# Altium PCB PCB1.PcbDoc
Units mm, origin at the board's own origin, x right, y up, seen from the top; angles counter-clockwise.
Board outline 50.42 x 30.35 mm, 2 copper layers (Top Layer, Bottom Layer); 42 components, 33 nets, 148 pads, 28 vias.
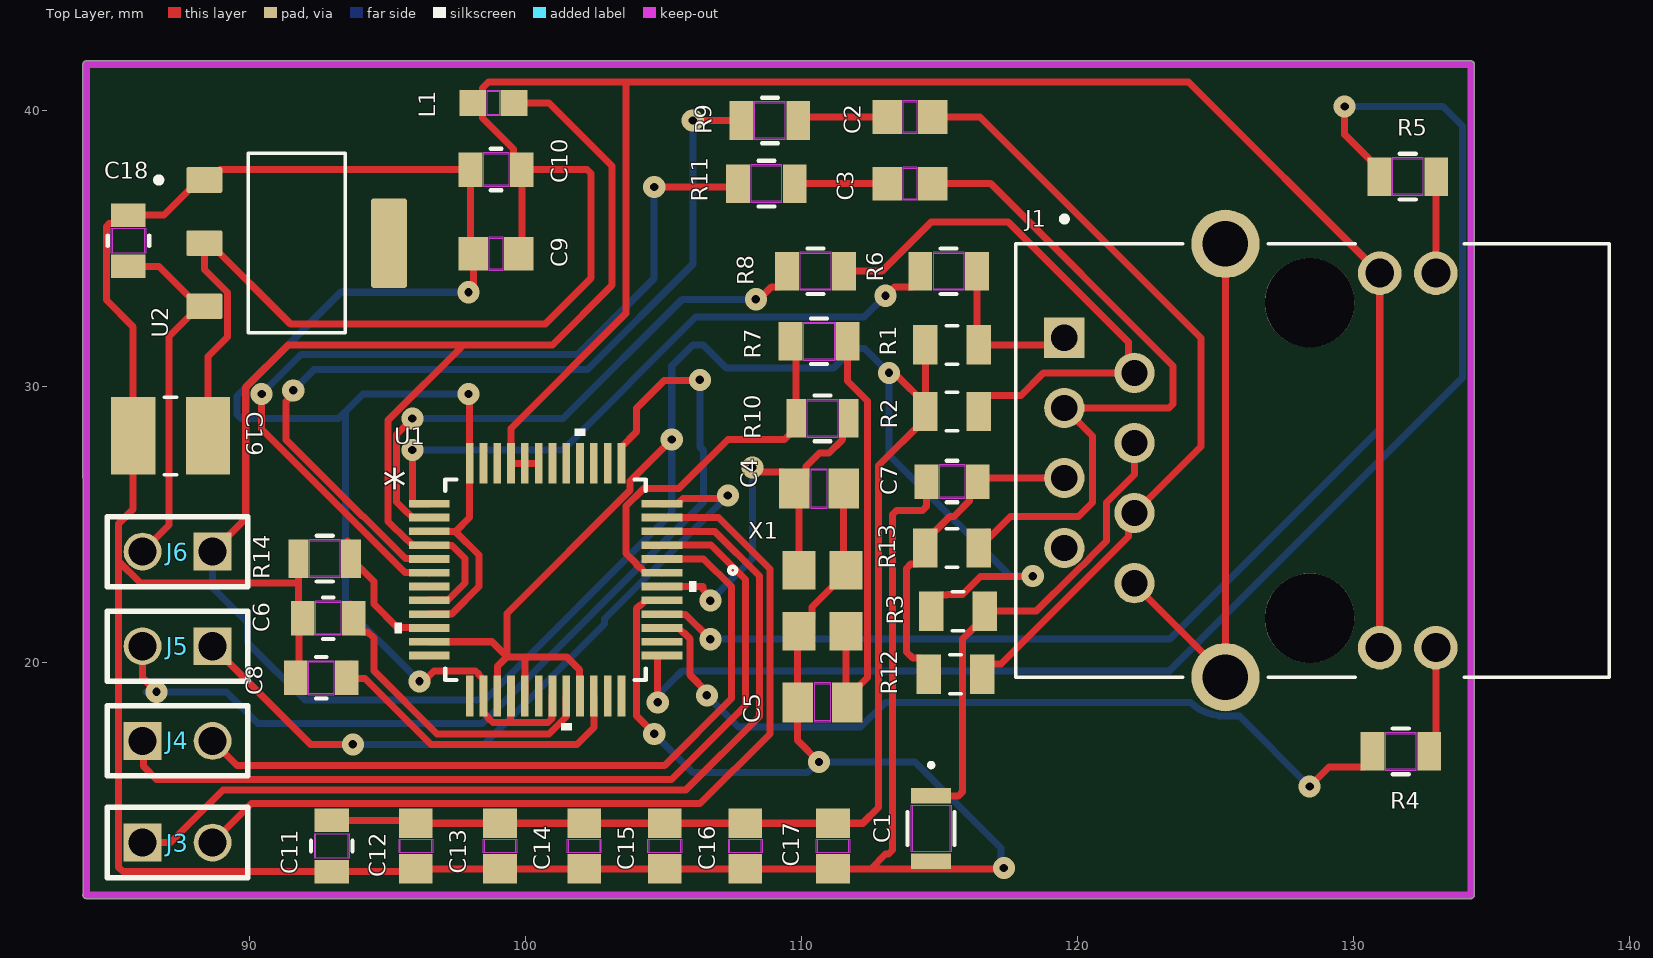
[diagram p0: Top Layer view]
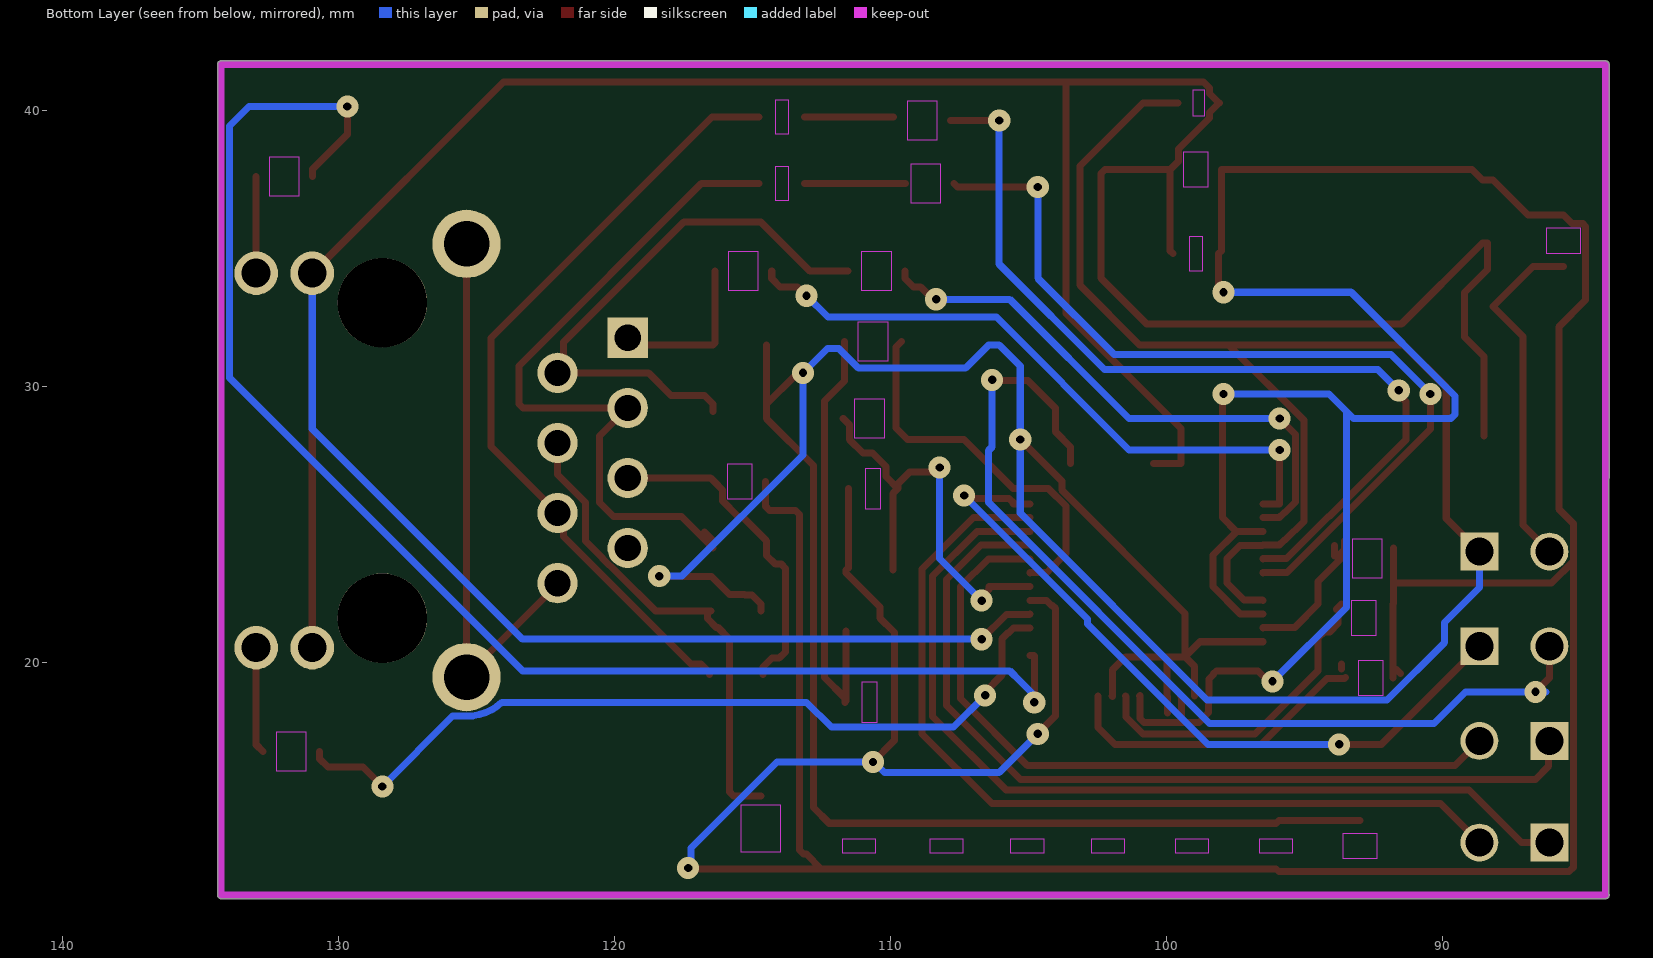
[diagram p1: Bottom Layer view, seen from below]
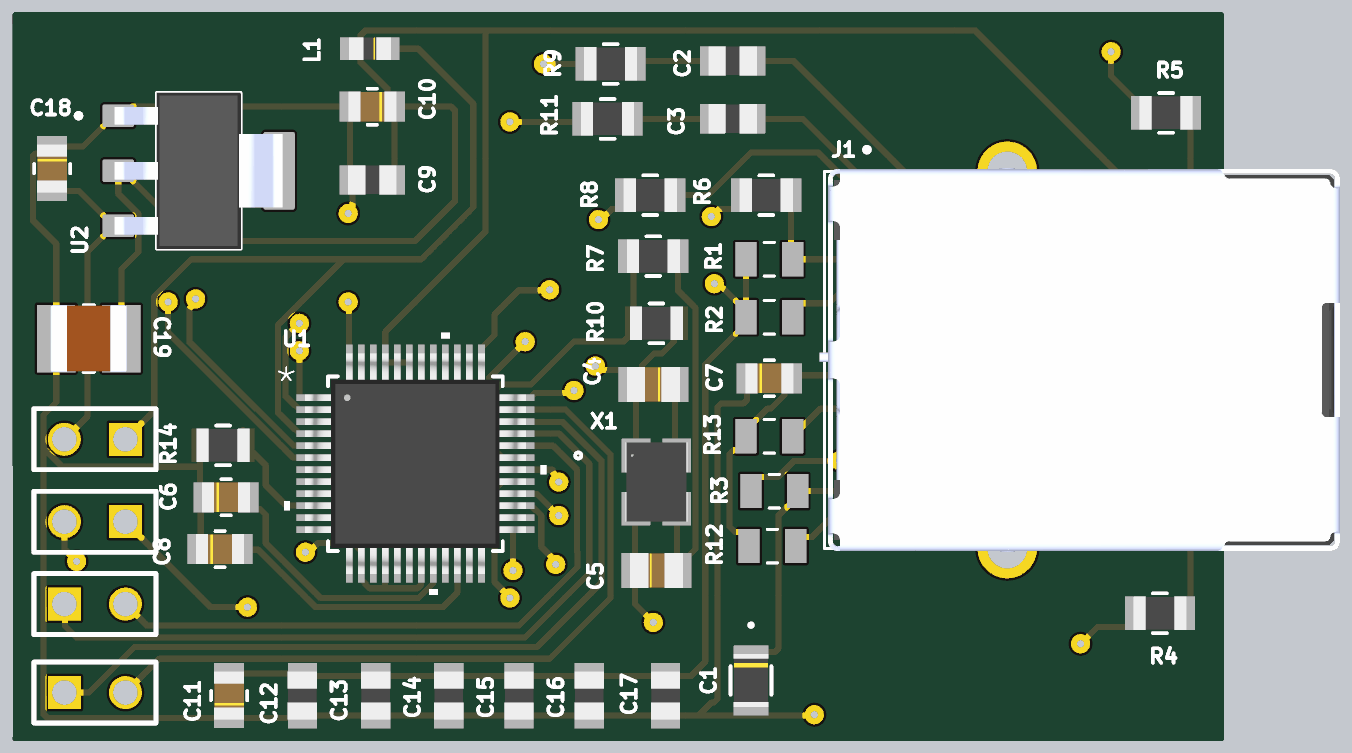
[diagram p2: 3D render of the assembled board from above, using the file's embedded part models]

## Layer stack, top to bottom
Top Solder: solder mask 0.0102, Solder Resist, Dk 3.5
Top Layer: signal copper 0.0356
Dielectric 1: dielectric 0.32, FR-4, Dk 4.8
Bottom Layer: signal copper 0.0356
Bottom Solder: solder mask 0.0102, Solder Resist, Dk 3.5

## Board outline
83.964,11.62 ccw(c84.074,11.557) 84.074,11.43 134.239,11.43 ccw(c134.239,11.557) 134.366,11.557 134.366,41.656 ccw(c134.239,41.656) 134.239,41.783 84.074,41.783 ccw(c84.074,41.656) 83.947,41.656

## Design rules (kind name [scope] priority, off if disabled: settings)
Clearance [All] p1: gap=0.05 ignorepadtopadclearanceinfootprint=FALSE
HoleSize [All] p1: absolutevalues=TRUE maxlimit=4 minlimit=0.025 maxpercent=80.000 minpercent=20.000
PolygonConnect [All] p1: connectstyle=Relief reliefconductorwidth=0.254 reliefentries=4 polygonreliefangle="90 Angle" airgapwidth=0.254
RoutingVias [All] p1: holewidth=0.711 width=1.27 viastyle="Through Hole" minholewidth=0.711 minwidth=1.27 maxholewidth=0.711 maxwidth=1.27
SolderMaskExpansion [All] p1: expansion=0.102 istentingtop=FALSE
Width [All] p1: maxlimit=0.254 minlimit=0.254 preferedwidth=0.254
29 further rules are at their usual default settings.

## Components (designator, comment, footprint, x,y, rotation, side; value= is the part's Value field where it differs from the comment)
C1 "22nF" CAP_2012_TDK 114.681,13.97 r270 top
C2 "CAP_6.8nfar_805pkg" CC0805N_YAG 113.919,39.751 r180 top
C3 "CAP_6.8nfar_805pkg" CC0805N_YAG 113.919,37.338 r180 top
C4 "18pF" CAP_CC0805_YAG 110.617,26.289 r180 top
C5 "18pF" CAP_CC0805_YAG 110.744,18.542 r0 top
C6 "4.7uF" CAP_CL21_SAM 92.837,21.59 r0 top
C7 "CAP_10nfar_805pkg" CAP_CL21_SAM 115.443,26.543 r0 top
C8 "10nF" CAP_CL21_SAM 92.583,19.431 r0 top
C9 "0.1uF" CC0805N_YAG 98.92,34.798 r180 top
C10 "10uF" CAP_CL21_SAM 98.92,37.846 r180 top
C11 "10uF" CAP_CL21_SAM 92.964,13.335 r90 top
C12 "0.1uF" CC0805N_YAG 96.012,13.335 r90 top
C13 "0.1uF" CC0805N_YAG 99.06,13.335 r90 top
C14 "0.1uF" CC0805N_YAG 102.108,13.335 r90 top
C15 "0.1uF" CC0805N_YAG 105.029,13.335 r90 top
C16 "0.1uF" CC0805N_YAG 107.95,13.335 r90 top
C17 "0.1uF" CC0805N_YAG 111.125,13.335 r90 top
C18 "10uF" CAP_CL21_SAM 85.598,35.267 r270 top
C19 "22uF" CAPC3225X280N 87.122,28.194 r0 top
J1 "ARJM11D7-009-AB-EW2" ABRACON_ARJM11D7-009-AB-EW2 128.397,27.305 r90 top
J3 "TSW-101-07-F-D" SAMTEC_TSW-101-07-F-D 87.376,13.462 r270 top
J4 "TSW-101-07-F-D" SAMTEC_TSW-101-07-F-D 87.376,17.145 r270 top
J5 "TSW-101-07-F-D" SAMTEC_TSW-101-07-F-D 87.376,20.574 r90 top
J6 "TSW-101-07-F-D" SAMTEC_TSW-101-07-F-D 87.376,24.003 r90 top
L1 "BLM18SG121TN1D" IND_BLM18_0603_MUR 98.819,40.259 r180 top
R1 "RES_49.9ohm_805pkg" RESC2012X60N 115.443,31.496 r180 top
R2 "RES_49.9ohm_805pkg" RESC2012X60N 115.443,29.083 r180 top
R3 "RES_49.9ohm_805pkg" RESC2012X60N 115.651,21.844 r180 top
R4 "330" RES_CRCW_0805_VIS 131.699,16.764 r0 top
R5 "330" RES_CRCW_0805_VIS 131.953,37.592 r0 top
R6 "RES_0ohm_805pkg" RES_CRCW_0805_VIS 115.316,34.163 r0 top
R7 "0" RES_CRCW_0805_VIS 110.617,31.623 r0 top
R8 "RES_0ohm_805pkg" RES_CRCW_0805_VIS 110.49,34.163 r0 top
R9 "RES_0ohm_805pkg" RES_CRCW_0805_VIS 108.839,39.624 r0 top
R10 "1M" RES_CRCW_0805 110.744,28.829 r0 top
R11 "RES_0ohm_805pkg" RES_CRCW_0805_VIS 108.712,37.338 r0 top
R12 "RES_49.9ohm_805pkg" RESC2012X60N 115.57,19.558 r0 top
R13 "RES_49.9ohm_805pkg" RESC2012X60N 115.443,24.13 r0 top
R14 "12.4K" RES_CRCW_0805 92.71,23.749 r180 top
U1 "W5500" 48LQFP_W5500_WIZ 100.711,22.987 r0 top
U2 "AMS1117-3.3" SOT229P700X180-4N 91.694,35.179 r0 top
X1 "OSC/25M" ABM8G_ABR 110.744,22.225 r0 top

## Footprints (in the part's own frame and the unit in brackets; to place one, negate y for a bottom-side part, rotate by r counter-clockwise, add the part's x,y. Pads: shape width x height; smd on the part's side, far side on the other; paste and mask are expansions set on the pad)
48LQFP_W5500_WIZ [mil]
  rect 58x11 smd paste+0 mask+0: 1(-166,108.27) 2(-166,88.58) 3(-166,68.9) 4(-166,49.21) 5(-166,29.53) 6(-166,9.84) 7(-166,-9.84) 8(-166,-29.53) 9(-166,-49.21) 10(-166,-68.9) 11(-166,-88.58) 12(-166,-108.27) 25(166,-108.27) 26(166,-88.58) 27(166,-68.9) 28(166,-49.21) 29(166,-29.53) 30(166,-9.84) 31(166,9.84) 32(166,29.53) 33(166,49.21) 34(166,68.9) 35(166,88.58) 36(166,108.27)
  rect 11x58 smd paste+0 mask+0: 13(-108.27,-166) 14(-88.58,-166) 15(-68.9,-166) 16(-49.21,-166) 17(-29.53,-166) 18(-9.84,-166) 19(9.84,-166) 20(29.53,-166) 21(49.21,-166) 22(68.9,-166) 23(88.58,-166) 24(108.27,-166) 37(108.27,166) 38(88.58,166) 39(68.9,166) 40(49.21,166) 41(29.53,166) 42(9.84,166) 43(-9.84,166) 44(-29.53,166) 45(-49.21,166) 46(-68.9,166) 47(-88.58,166) 48(-108.27,166)
  silkscreen extent -215,-215 215,215, body extent -181,-181 181,181, height 63
ABM8G_ABR [mil]
  rect 47x55 smd paste+0 mask+0: 1(-33.5,43.5) 2(-33.5,-43.5) 3(33.5,-43.5) 4(33.5,43.5)
  silkscreen extent -133,39 -123,48, body extent -51,-65 51,65, height 39
ABRACON_ARJM11D7-009-AB-EW2 [mm]
  rect 1.458x1.458 / inner round 1.458 / far side rect 1.458x1.458 hole 0.95: 1(4.445,8.89)
  round 1.458 hole 0.95: 2(3.175,6.35) 3(1.905,8.89) 4(0.635,6.35) 5(-0.635,8.89) 6(-1.905,6.35) 7(-3.175,8.89) 8(-4.445,6.35)
  round 1.575 hole 1.05: 9(-6.785,-2.54) 10(-6.785,-4.57) 11(6.785,-2.54) 12(6.785,-4.57)
  round 2.475 hole 1.65: SH1(-7.85,3.05) SH2(7.85,3.05)
  round 3.25 hole 3.25 unplated: ""(-5.715,0) ""(5.715,0)
  silkscreen extent -7.85,-10.85 8.85,10.65, body extent -7.99,-10.8 7.99,10.85, height 13.26
CAP_2012_TDK [mil]
  rect 22x57 smd paste+0 mask+0: 1(-46.5,0) 2(46.5,0)
  Top Layer keep-out region: -33.5,-26.5 -33.5,26.5 33.5,26.5 33.5,-26.5
  Keep-Out Layer region: -33.5,-28.5 -33.5,28.5 33.5,28.5 33.5,-28.5
  silkscreen extent -93,-34 23,34, body extent -44,-29 44,29, height 49
CAP_CC0805_YAG [mil]
  rect 44x57 smd paste+0 mask+0: 1(-35.31,0) 2(35.31,0)
  Top Layer keep-out region: -11.31,-26.5 -11.31,26.5 11.31,26.5 11.31,-26.5
  Keep-Out Layer region: -11.31,-28.5 -11.31,28.5 11.31,28.5 11.31,-28.5
  body extent -43,-29 43,29, height 57
CAP_CL21_SAM [mm]
  rect 0.856x1.25 smd paste+0 mask+0: 1(-0.928,0) 2(0.928,0)
  Top Layer keep-out region: -0.449,-0.574 -0.449,0.574 0.449,0.574 0.449,-0.574
  Keep-Out Layer region: -0.449,-0.625 -0.449,0.625 0.449,0.625 0.449,-0.625
  silkscreen extent -0.19,-0.75 0.19,0.75, body extent -1,-0.63 1,0.63, height 1.35
CAPC3225X280N [mm]
  rect 1.6x2.81 smd: 1(-1.353,0) 2(1.353,0)
  silkscreen extent -0.23,-1.4 0.23,1.4, body extent -1.6,-1.4 1.6,1.4, height 2.47
CC0805N_YAG [mil]
  rect 42x48 smd paste+0 mask+0: 1(-32.5,0) 2(32.5,0)
  Top Layer keep-out region: -9.5,-22 -9.5,22 9.5,22 9.5,-22
  Keep-Out Layer region: -9.5,-24 -9.5,24 9.5,24 9.5,-24
  body extent -39,-24 39,24, height 28
IND_BLM18_0603_MUR [mil]
  rect 38x37 smd paste+0 mask+0: 1(-29.5,0) 2(29.5,0)
  Top Layer keep-out region: -8.5,-16.5 -8.5,16.5 8.5,16.5 8.5,-16.5
  Keep-Out Layer region: -8.5,-18.5 -8.5,18.5 8.5,18.5 8.5,-18.5
  body extent -34,-19 34,19, height 37
RES_CRCW_0805 [mil]
  rect 28x55 smd paste-27.5 mask-27.5: 1(-37.5,0) 2(37.5,0)
  Top Layer keep-out region: -21.5,-25.5 -21.5,25.5 21.5,25.5 21.5,-25.5
  Keep-Out Layer region: -21.5,-27.5 -21.5,27.5 21.5,27.5 21.5,-27.5
  silkscreen extent -11,-32 11,32, body extent -44,-27 44,27, height 20
RES_CRCW_0805_VIS [mil]
  rect 34x55 smd paste+0 mask+0: 1(-40.5,0) 2(40.5,0)
  Top Layer keep-out region: -21.5,-25.5 -21.5,25.5 21.5,25.5 21.5,-25.5
  Keep-Out Layer region: -21.5,-27.5 -21.5,27.5 21.5,27.5 21.5,-27.5
  silkscreen extent -11,-32 11,32, body extent -44,-27 44,27, height 20
RESC2012X60N [mm]
  rect 0.89x1.42 smd: 1(-0.97,0) 2(0.97,0)
  silkscreen extent -0.21,-0.7 0.21,0.7
SAMTEC_TSW-101-07-F-D [mm]
  rect 1.37x1.37 hole 1.02: 01(0,-1.27)
  round 1.37 hole 1.02: 02(0,1.27)
  silkscreen extent -1.27,-2.54 1.27,2.54
SOT229P700X180-4N [mm]
  rrect15% 1.31x0.93 smd: 1(-3.345,2.29) 2(-3.345,0) 3(-3.345,-2.29)
  rrect15% 1.31x3.24 smd: 4(3.345,0)
  silkscreen extent -5.1,-3.25 1.75,3.25, body extent -3.5,-3.25 3.5,3.25, height 1.8

## Part data
C1: library part CAP_22nfar_805pkg, "No Description Available", Mfr_Name=TDK
C2 C3: "No Description Available", Mfr_Name=Yageo
C4 C5: library part CAP_18pfar_805pkg, "No Description Available", Mfr_Name=Yageo
C6: library part CAP_4.7ufar_805pkg, "No Description Available", Mfr_Name=Samsung
C7: "No Description Available", Mfr_Name=Samsung
C8: library part CAP_10nfar_805pkg, "No Description Available", Mfr_Name=Samsung
C9 C12 C13 C14 C15 C16 C17: library part CAP_0.1ufar_805pkg, "No Description Available", Mfr_Name=Yageo
C10 C11 C18: library part CAP_10ufar_805pkg, "No Description Available", Mfr_Name=Samsung
C19: library part GCJ32ER71C226KE01L, "SMD Capacitor X7R_EIA_ with Capacitance: 22uF Tol. 10%. Rated Voltage: 16Vdc", Package="3225 Murata", Availability=Unavailable, MF=Murata, MP=GCJ32ER71C226KE01L, Price=None, SnapEDA_Link=https://www.snapeda.com/parts/GCJ32ER71C226KE01L/Murata/view-part/4383175/?ref=snap
J1 J3 J4 J5 J6: Package=None, Availability=Unavailable, Price=None
  J1: MF="{'manufacturer': u'Abracon LLC'}", MP=ARJM11D7-009-AB-EW2
  J3 J4 J5 J6: MF=Samtec, MP=TSW-101-07-F-D
L1: "No Description Available", Mfr_Name=Murata
R1 R2 R3 R12 R13: "49.9 Ohms Â±1% 0.125W, 1/8W Chip Resistor 0805 _2012 Metric_ Thick Film", Package="2012 Vishay", Digi-Key_Part_Number=541-4144-1-ND, Digi-Key_Purchase_URL=https://www.digikey.tn/product-detail/en/vishay-dale/CRCW080549R9FKEAC/541-4144-1-ND/7928827?utm_source=snapeda&utm_medium=aggregator&utm_campaign=symbol, MF=Vishay, MP=CRCW080549R9FKEAC, SnapEDA_Link=https://www.snapeda.com/parts/CRCW080549R9FKEAC/Vishay/view-part/4164271/?ref=snap
R4 R5: library part RES_330ohm_805pkg, "No Description Available", Mfr_Name=Vishay
R6 R8 R9 R11: "No Description Available", Mfr_Name=Vishay
R7: library part RES_0ohm_805pkg, "No Description Available", Mfr_Name=Vishay
R10: library part RES_1Mohm_805pkg, "No Description Available", Mfr_Name=Vishay
R14: library part RES_12.4Kohm_805pkg, "No Description Available", Mfr_Name=Vishay
U1: "No Description Available", Mfr_Name=WIZnet, RefDes=RefDes, Type=Type
U2: "Sot223/Pkg 1-Amp 3.3-Volt Low Drop Out Voltage Regulatator", Package="SOT-223 Seeed Technology", Availability="Not in stock", Check_prices=https://www.snapeda.com/parts/AMS1117-3.3/Advanced+Monolithic+Systems/view-part/?ref=eda, MF="Advanced Monolithic Systems", MP=AMS1117-3.3, Price=None, SnapEDA_Link=https://www.snapeda.com/parts/AMS1117-3.3/Advanced+Monolithic+Systems/view-part/?ref=snap
X1: library part ABM8G-25.000MHZ-4Y-T3, "No Description Available", Mfr_Name=Abracon, RefDes=RefDes, Type=Crystals

## Via types
v1: diameter 0.8, hole 0.3, Top Layer to Bottom Layer, 28 vias

## Nets (pads, with @x,y where several pads share a name; then routed paths per layer and width w, separated by ;. In a path a pad name is that pad's centre, name@x,y a point inside that pad or via, vN(x,y) a via of type N, cw(c..) or ccw(c..) an arc to the next point about the centre after c; other vN are vias at no path point)
3V3A: C11.2 C12.2 C13.2 C14.2 C15.2 C16.2 C17.2 J6.01 L1.1 R1.2 R2.2 R3.2 U1.4 U1.8 U1.11 U1.15 U1.17 U1.21 | length 155.3
  Top Layer w0.254: J6.01 89.847,25.204 89.847,29.957 91.386,31.496 97.736,31.496 ; C11.2 95.91,14.263 C12.2 C13.2 C14.2 C15.2 C16.2 C17.2 112.204,14.16 112.776,14.732 112.776,27.121 114.473,28.818 R2.2 R2.2@114.473,29.348 ; U1.11 98.77,20.737 99.314,20.193 ; U1.8 96.507,22.25 97.18,22.25 97.79,22.86 97.79,23.749 97.315,24.224 96.507,24.224 U1.4 95.898,24.237 95.714,24.42 95.685,24.42 95.004,25.101 95.004,28.764 97.736,31.496 ; U1.15 98.961,19.84 99.314,20.193 ; L1.1 100.838,40.259 103.124,37.973 103.124,33.655 100.965,31.496 97.736,31.496 ; U1.17@99.948,18.161 99.948,18.758 U1.17 99.961,20.181 99.949,20.193 ; U1.21@101.948,18.758 U1.21 101.948,18.783 101.948,19.718 101.473,20.193 99.949,20.193 ; v1(105.283,28.067) 103.778,26.562 103.778,26.23 99.314,21.766 99.314,20.193 ; v1(113.157,30.48) 113.261,30.376 113.445,30.376 R2.2@114.473,29.348 ; R1.2 R2.2@114.473,29.348 ; R3.2 114.681,22.109 114.999,22.427 115.264,22.427 115.28,22.443 115.814,22.443 116.474,23.102 118.352,23.102 v1(118.364,23.114) ; 99.314,20.193 99.949,20.193
  Bottom Layer w0.254: J6.01 88.646,22.708 89.916,21.438 89.916,20.701 91.988,18.629 98.512,18.629 105.283,25.4 v1(105.283,28.067) 105.283,30.734 106.045,31.496 106.426,31.496 107.259,30.663 111.152,30.663 111.858,31.369 112.268,31.369 v1(113.157,30.48) 113.157,27.504 117.547,23.114 v1(118.364,23.114)
3V3D: C9.1 C10.1 C19.2 J1.9 J1.11 L1.2 U1.28 U1.43 U1.44 U1.45 U2.2 | length 137.6
  Top Layer w0.254: C19.2 88.475,31.076 89.181,31.782 89.181,33.386 88.349,34.218 U2.2 88.539,35.179 91.46,32.258 100.711,32.258 102.362,33.909 102.362,37.697 102.213,37.846 C10.1 ; L1.2 L1.2@98.082,40.259 ; 98.425,40.75 98.425,40.602 L1.2@98.082,40.259 ; 98.426,40.751 98.426,40.802 98.645,41.021 102.743,41.021 102.87,41.021 103.632,41.021 ; C9.1 99.848,34.9 99.848,37.649 C10.1 ; U1.43 U1.44 U1.45 99.461,28.468 103.632,32.639 103.632,41.021 ; U1.28 104.94,21.724 105.784,21.724 v1(106.68,20.828) ; J1.9 J1.11 124.006,41.021 103.632,41.021 ; L1.2@98.082,40.259 98.425,39.916 98.425,39.717 99.547,38.594 99.547,38.147 C10.1
  Bottom Layer w0.254: v1(106.68,20.828) 123.317,20.828 130.937,28.448 J1.11
5V: C18.2 J6.02 U2.3 | length 12.9
  Top Layer w0.254: C18.2 86.709,34.339 88.159,32.889 87.07,31.8 87.07,24.967 J6.02
ACTLED: R4.1 U1.27 | length 30.3
  Top Layer w0.254: U1.27 105.524,21.237 105.708,21.054 105.737,21.054 105.952,20.839 105.952,19.524 106.553,18.923 v1(106.553,18.796) ; v1(128.397,15.494) 129.095,16.192 130.365,16.192 130.67,16.497 R4.1
  Bottom Layer w0.254: v1(106.553,18.796) 107.706,17.643 110.382,17.643 110.383,17.641 112.129,17.641 113.03,18.542 124.063,18.542 ccw(c125.347,19.935) 125.347,18.04 125.85,18.04 v1(128.397,15.494)
CGND: J1.8 J1.SH1 J1.SH2 | length 20.4
  Top Layer w0.254: J1.8 122.047,22.808 J1.SH1@125.347,19.508 ; J1.SH1 J1.SH1@125.347,19.508 ; J1.SH2 J1.SH1@125.347,19.508
CS: J4.02 U1.32 | length 27.2
  Top Layer w0.254: J4.02 89.535,16.256 105.029,16.256 107.453,18.68 107.453,19.293 107.442,19.304 107.442,22.733 106.438,23.737 U1.32
GND: C1.2 C4.1 C5.1 C6.1 C7.1 C8.1 C9.2 C10.2 C11.1 C12.1 C13.1 C14.1 C15.1 C16.1 C17.1 C18.1 C19.1 R14.2 U1.3 U1.9 U1.14 U1.16 U1.19 U1.29 U1.48 U2.1 X1.2 X1.4 | length 183.5
  Top Layer w0.254: C8.1@91.504,19.583 C8.1@91.655,19.734 ; R14.2@91.757,24.13 91.757,22.86 ; C8.1@91.782,19.431 91.782,22.098 91.757,22.123 91.757,22.86 ; v1(96.139,19.304) 96.287,19.304 96.667,19.684 98.174,19.684 98.278,19.581 98.278,19.551 98.448,19.38 98.448,18.783 U1.14 98.461,18.174 98.644,17.99 98.644,17.961 98.801,17.804 99.441,17.804 ; U1.9 96.507,21.75 97.315,21.75 98.298,22.733 98.298,23.876 97.45,24.724 ; U1.3 96.507,24.724 97.45,24.724 ; v1(97.917,29.718) 97.948,29.687 97.948,27.216 U1.48 97.961,25.236 97.45,24.724 ; v1(97.917,33.401) 98.095,33.579 C9.2 97.992,34.9 C10.2 88.916,37.846 88.539,37.469 U2.1 88.159,37.469 86.885,36.195 C18.1 85.297,35.894 84.9,35.894 84.796,35.79 84.796,33.117 85.769,32.144 C19.1 85.769,25.543 85.244,25.018 85.244,23.646 ; U1.16@99.474,18.783 U1.16 99.448,18.758 99.448,17.812 99.441,17.804 ; U1.19@100.948,18.783 U1.19 100.948,18.758 100.948,17.953 100.8,17.804 99.441,17.804 ; v1(104.648,17.399) 104.648,17.415 104.014,18.049 104.014,21.95 104.117,22.054 104.147,22.054 104.331,22.237 U1.29 ; v1(110.617,16.383) 109.847,17.153 C5.1 109.847,21.074 X1.2 110.363,21.59 110.363,21.996 111.595,23.228 X1.4 111.514,23.411 C4.1 ; C7.1 114.515,25.645 114.366,25.496 113.433,25.496 113.284,25.348 113.284,13.192 113.135,13.043 113.03,13.043 112.497,12.509 ; v1@117.348,12.573 v1(117.316,12.541) 117.284,12.509 112.497,12.509 ; 85.244,23.646 85.244,12.556 85.393,12.407 95.91,12.407 C12.1 C13.1 C14.1 C15.1 C16.1 C17.1 112.497,12.509 ; 85.244,23.646 86.03,22.86 91.757,22.86
  Bottom Layer w0.254: v1(96.139,19.304) 93.463,21.98 93.463,29.085 ; v1(97.917,29.718) 94.097,29.718 93.463,29.085 ; v1(97.917,33.401) 93.291,33.401 89.535,29.645 89.535,28.978 89.684,28.829 93.208,28.829 93.463,29.085 ; v1(104.648,17.399) 106.045,16.002 110.195,16.002 110.576,16.383 114.093,16.383 117.212,13.264 117.212,12.646 v1(117.316,12.541)
INT: J5.01 U1.36 | length 26.5
  Top Layer w0.254: J5.01 92.202,17.018 v1(93.726,17.018) ; U1.36 105.524,25.737 105.537,25.75 105.537,25.782 105.686,25.931 107.211,25.931 v1(107.315,26.035)
  Bottom Layer w0.254: v1(93.726,17.018) 98.474,17.018 102.842,21.386 102.842,21.562 v1(107.315,26.035)
LINKLED: R5.1 U1.25 | length 52.8
  Top Layer w0.254: v1(104.775,18.542) 104.775,20.224 104.788,20.237 U1.25 ; v1(129.667,40.132) 129.667,39.116 130.924,37.859 R5.1
  Bottom Layer w0.254: v1(104.775,18.542) 104.879,18.646 104.879,18.9 105.272,19.293 105.664,19.685 123.317,19.685 133.935,30.303 133.935,39.42 133.223,40.132 v1(129.667,40.132)
MISO: J3.01 U1.34 | length 33.5
  Top Layer w0.254: J3.01 87.122,13.462 89.027,15.367 105.791,15.367 108.458,18.034 108.458,23.114 106.848,24.724 104.94,24.724 U1.34
MOSI: J3.02 U1.35 | length 32.5
  Top Layer w0.254: J3.02 90.055,14.871 106.311,14.871 108.839,17.399 108.839,23.368 106.97,25.237 U1.35
NetC1_1: C1.1 J1.4 R3.1 | length 17.7
  Top Layer w0.254: C1.1 115.675,15.151 115.824,15.3 115.824,20.841 116.244,21.261 116.303,21.261 116.621,21.579 R3.1 ; R3.1@116.495,21.844 118.491,21.844 119.871,23.224 119.882,23.224 120.413,23.755 120.413,23.766 121.031,24.384 121.031,25.781 122.047,26.797 J1.4
NetC2_1: C2.1 J1.6 R12.2 | length 28.7
  Top Layer w0.254: C2.1 116.459,39.751 124.46,31.75 124.46,27.813 J1.6 121.834,25.187 121.834,24.552 117.217,19.935 116.858,19.935 116.54,19.617 R12.2
NetC2_2: C2.2 R9.2 | length 3.2
  Top Layer w0.254: R9.2@109.868,39.751 C2.2
NetC3_1: C3.1 J1.3 R13.2 | length 25.9
  Top Layer w0.254: C3.1 116.84,37.338 123.444,30.734 123.444,29.359 123.295,29.21 J1.3 120.523,28.194 120.523,25.781 120.015,25.273 117.556,25.273 R13.2 ; R13.2@116.413,24.395 R13.2@116.731,24.713
NetC3_2: C3.2 R11.2 | length 3.7
  Top Layer w0.254: R11.2@109.435,37.338 R11.2 C3.2
NetC4_2: C4.2 R10.2 U1.30 X1.1 | length 16.1
  Top Layer w0.254: U1.30 106.422,22.737 106.422,22.631 106.68,22.373 v1(106.68,22.225) ; v1(108.204,27.051) 108.369,26.886 109.288,26.886 109.72,26.454 C4.2 ; X1.1 109.893,26.116 C4.2 ; R10.2 111.468,28.6 111.468,28.058 110.982,27.572 110.639,27.572 110.152,27.085 110.152,26.721 C4.2
  Bottom Layer w0.254: v1(106.68,22.225) 108.204,23.749 v1(108.204,27.051)
NetC5_2: C5.2 R7.2 X1.3 | length 16.3
  Top Layer w0.254: X1.3 111.595,18.588 C5.2 111.641,18.707 112.369,19.435 112.369,29.461 111.646,30.184 R7.2
NetC6_2: C6.2 U1.20 | length 11.5
  Top Layer w0.254: C6.2@93.638,22.098 C6.2@93.821,21.915 ; C6.2 93.765,21.393 94.066,21.092 94.263,21.092 94.488,20.867 94.488,19.685 96.774,17.399 100.838,17.399 101.448,18.009 101.448,18.758 U1.20
NetC7_2: C7.2 J1.5 R12.1 R13.1 | length 12.2
  Top Layer w0.254: R12.1 114.6,19.823 114.282,20.141 114.017,20.141 113.792,20.366 113.792,23.398 113.941,23.547 114.155,23.547 114.473,23.865 114.473,24.395 115.357,25.279 115.504,25.279 116.07,25.845 116.07,26.242 C7.2 116.498,26.67 J1.5 J1.5@119.507,26.427
NetC8_2: C8.2 U1.22 | length 11.6
  Top Layer w0.254: C8.2@93.501,19.441 93.536,19.406 94.171,19.406 96.559,17.018 101.854,17.018 102.461,17.625 U1.22 ; C8.2@93.638,19.742 C8.2@93.638,19.939
NetJ1_1: J1.1 R1.1 R6.2 | length 5.9
  Top Layer w0.254: R6.2 116.345,31.564 R1.1 119.253,31.496 J1.1
NetJ1_2: J1.2 R2.1 R8.2 | length 20.4
  Top Layer w0.254: R8.2 112.907,34.163 114.685,35.941 117.475,35.941 121.826,31.59 121.826,30.701 J1.2 118.745,30.48 117.931,29.666 116.731,29.666 116.413,29.348 R2.1
NetJ1_10: J1.10 R4.2 | length 3.9
  Top Layer w0.254: R4.2 132.967,17.003 J1.10
NetJ1_12: J1.12 R5.2 | length 3.5
  Top Layer w0.254: J1.12 132.967,37.577 R5.2
NetR6_1: R6.1 U1.1 | length 23.8
  Top Layer w0.254: v1(95.885,27.686) 95.885,25.75 95.898,25.737 U1.1 ; v1(113.03,33.274) 113.347,33.591 113.983,33.591 114.287,33.896 R6.1
  Bottom Layer w0.254: v1(95.885,27.686) 101.336,27.686 106.148,32.498 112.254,32.498 v1(113.03,33.274)
NetR7_1: R7.1 R10.1 U1.31 | length 13.9
  Top Layer w0.254: U1.31 104.915,23.25 104.318,23.25 104.147,23.42 104.117,23.42 104.014,23.524 104.014,23.554 103.632,23.935 103.632,25.654 104.267,26.289 105.537,26.289 107.315,28.067 109.372,28.067 109.791,28.486 R10.1 109.791,31.42 R7.1
NetR8_1: R8.1 U1.2 | length 20.6
  Top Layer w0.254: v1(95.885,28.829) 95.308,28.252 95.308,25.797 95.685,25.42 95.714,25.42 95.898,25.237 U1.2 ; v1(108.331,33.147) 108.445,33.147 108.89,33.591 109.156,33.591 109.461,33.896 R8.1
  Bottom Layer w0.254: v1(95.885,28.829) 101.346,28.829 105.664,33.147 v1(108.331,33.147)
NetR9_1: R9.1 U1.5 | length 32.2
  Top Layer w0.254: v1(91.567,29.845) 91.567,29.697 91.313,29.443 91.313,28.047 94.087,25.273 94.107,25.273 95.63,23.75 96.482,23.75 U1.5 ; v1(106.045,39.624) R9.1
  Bottom Layer w0.254: v1(91.567,29.845) 92.329,30.607 102.235,30.607 106.045,34.417 v1(106.045,39.624)
NetR11_1: R11.1 U1.6 | length 31.8
  Top Layer w0.254: v1(90.424,29.718) 90.424,28.448 95.622,23.25 96.482,23.25 U1.6 ; v1(104.648,37.211) 107.556,37.211 R11.1
  Bottom Layer w0.254: v1(90.424,29.718) 91.846,31.14 101.879,31.14 104.648,33.909 v1(104.648,37.211)
NetR14_1: R14.1 U1.10 | length 5.6
  Top Layer w0.254: R14.1@93.535,24.384 93.535,24.07 R14.1@93.764,23.842 ; R14.1 94.488,22.924 94.488,22.098 95.336,21.25 96.482,21.25 U1.10 ; R14.1@93.891,23.842 R14.1@93.891,23.873 ; R14.1@93.891,24.096 R14.1@93.891,23.873 ; R14.1@93.891,24.223 R14.1@93.891,23.873
RST: J5.02 U1.37 | length 35.3
  Top Layer w0.254: J5.02 86.106,19.431 v1(86.614,18.923) ; U1.37 103.461,27.8 104.013,28.352 104.013,29.21 105.01,30.207 106.28,30.207 v1(106.299,30.226)
  Bottom Layer w0.254: v1@86.235,18.923 v1(86.614,18.923) 89.154,18.923 90.297,17.78 98.425,17.78 106.426,25.781 106.426,27.676 106.299,27.803 v1(106.299,30.226)
SCK: J4.01 U1.33 | length 32.2
  Top Layer w0.254: J4.01 86.134,17.117 86.134,16.228 86.614,15.748 105.27,15.748 107.95,18.428 107.95,22.987 106.7,24.237 U1.33
pads on no net: J1. J1.7 U1.7 U1.12 U1.13 U1.18 U1.23 U1.24 U1.26 U1.38 U1.39 U1.40 U1.41 U1.42 U1.46 U1.47 U2.4

## Keep-outs
Keep-Out Layer:
  lines w0.254: 84.074,11.557 134.239,11.557 134.239,41.656 84.201,41.656 84.074,41.656 84.074,11.684

## Text inside footprints (layer, text, board x,y; h text height)
U1: Top Overlay "*" at 94.805,25.733 h1.27; Mechanical 13 "*" at 97.269,25.352 h1.27